# EAGLE board final_project (EAGLE 7.6.0)

Size 73.58 x 63.39 mm. Coordinates in mm from the lower left corner, seen from the top.
Outline: 0,0 56.82,0 56.82,53.33 0,53.33 0,0
Copper layers (1*16): Top 0.035mm / dielectric 1.5mm / Bottom 0.035mm
Design rules "default": minimum track width 10mil, minimum drill 24mil, track to track 8mil, track to pad 8mil, pad to pad 8mil, via to via 8mil, smd to smd 8mil, copper to edge 40mil, drill to drill 8mil, minimum pad ring 10mil, minimum via ring 8mil, stop-mask expansion 4mil, vias tented up to drill 0mil, thermal gap 10mil

## Footprints (pad centres in the part's own frame; a part is rotated, then mirrored left to right if it is on the bottom)
SNR6-D19.0MM = drill 1.3 pad 2: 1 -3.355,3.355; 2 -3.355,-3.355; 3 3.355,3.355; 4 3.355,-3.355; 5 0,4.75; 6 0,-4.75
2P-2.54-65/35MIL = drill 0.889 pad 1.651 square: 1 0,1.27 | drill 0.889 pad 1.651: 2 0,-1.27
1X3P-2.54-2.54-11.6-3.0-BLACK-MALE = drill 0.889 pad 1.651 square: 1 0,2.54 | drill 0.889 pad 1.651: 2 0,0; 3 0,-2.54
0207/10 = drill 0.813 octagon: 1 -5.08,0; 2 5.08,0
PT-10 = drill 1.016 octagon: A -2.54,-5.08; E 2.54,-5.08; S 0,5.08
TO92 = drill 0.813 octagon: 1 1.27,0; 2 0,1.905; 3 -1.27,0
ARDUINO_UNO = drill 1.016 pad 1.88: 0 63.5,50.8; 1 60.96,50.8; 2 58.42,50.8; 3 55.88,50.8; 3.3V 35.56,2.54; 4 53.34,50.8; 5 50.8,50.8; 5V 38.1,2.54; 6 48.26,50.8; 7 45.72,50.8; 8 41.656,50.8; 9 39.116,50.8; 10 36.576,50.8; 11 34.036,50.8; 12 31.496,50.8; 13 28.956,50.8; A0 50.8,2.54; A1 53.34,2.54; A2 55.88,2.54; A3 58.42,2.54; A4 60.96,2.54; A5 63.5,2.54; AREF 23.876,50.8; GND 26.416,50.8; GND. 43.18,2.54; GND.. 40.64,2.54; I/OREF 30.48,2.54; N/C 27.94,2.54; RESET 33.02,2.54; SCL 18.796,50.8; SDA 21.336,50.8; VIN 45.72,2.54 | hole 3.2: 66.04,7.62; 66.04,35.56; 15.24,50.8; 13.97,2.54
1X16P-2.54-2.54-11.6-3.0-BLACK-MALE = drill 0.889 pad 1.651 square: 1 0,19.05 | drill 0.889 pad 1.651: 2 0,16.51; 3 0,13.97; 4 0,11.43; 5 0,8.89; 6 0,6.35; 7 0,3.81; 8 0,1.27; 9 0,-1.27; 10 0,-3.81; 11 0,-6.35; 12 0,-8.89; 13 0,-11.43; 14 0,-13.97; 15 0,-16.51; 16 0,-19.05

## Placement (x,y rotation side)
GAS1  [SNR6-D19.0MM]  5,111.68 0 top  (outside the outline)
MDC motor  [2P-2.54-65/35MIL]  5,22.78 0 top
PING1  [1X3P-2.54-2.54-11.6-3.0-BLACK-MALE]  5,137.08 0 top  (outside the outline)
R1  330‎Ω  [0207/10]  5,73.58 0 top  (outside the outline)
R4  1k‎Ω  [0207/10]  5,124.38 0 top  (outside the outline)
R5  200‎Ω  [0207/10]  5,86.28 0 top  (outside the outline)
RPotenciometer1  [PT-10]  5,60.88 0 top
TT-NPN (BJT)  [TO92]  5,35.48 0 top
UArduino Uno  [ARDUINO_UNO]  5,10.08 0 top
ULCD1  [1X16P-2.54-2.54-11.6-3.0-BLACK-MALE]  5,48.18 0 top
USensor LM35  [TO92]  5,98.98 0 top  (outside the outline)

## Library data of the parts
GAS1 MDC motor PING1 R1 R4 R5 RPotenciometer1 TT-NPN (BJT) UArduino Uno ULCD1 USensor LM35 = AUTODESK_CIRCUITS_BREADBOARD

## Nets
N$1: UArduino Uno.A0 USensor LM35.2
N$2: R1.2 TT-NPN (BJT).2
N$3: R1.1 UArduino Uno.13
N$4: MDC motor.2 TT-NPN (BJT).1
N$7: UArduino Uno.12
N$8: UArduino Uno.11
N$9: RPotenciometer1.S ULCD1.3
N$10: R5.2 ULCD1.16
N$11: UArduino Uno.7 ULCD1.14
N$12: UArduino Uno.6 ULCD1.13
N$13: UArduino Uno.5 ULCD1.12
N$14: UArduino Uno.4 ULCD1.11
N$15: UArduino Uno.2 ULCD1.4
N$16: UArduino Uno.3 ULCD1.6
N$17: GAS1.3 UArduino Uno.A1
N$18: GAS1.5 MDC motor.1 PING1.1 R4.2 R5.1 RPotenciometer1.E UArduino Uno.GND.. ULCD1.1 ULCD1.5 USensor LM35.1
N$19: GAS1.1 R4.1
N$20: GAS1.2 GAS1.4 GAS1.6 PING1.2 RPotenciometer1.A TT-NPN (BJT).3 UArduino Uno.5V ULCD1.2 ULCD1.15 USensor LM35.3
N$21: PING1.3 UArduino Uno.A2

## Tracks (layer width: path | path; a pad name or v marks a point on that pad's centre or on a via)
N$1  (1 unrouted)
N$2  (1 unrouted)
N$3  (1 unrouted)
N$4  (1 unrouted)
N$9  (1 unrouted)
N$10  (1 unrouted)
N$11  (1 unrouted)
N$12  (1 unrouted)
N$13  (1 unrouted)
N$14  (1 unrouted)
N$15  (1 unrouted)
N$16  (1 unrouted)
N$17  (1 unrouted)
N$18  (9 unrouted)
N$19  (1 unrouted)
N$20  (9 unrouted)
N$21  (1 unrouted)